# EAGLE board nummerpresentation (EAGLE 4.16)

Size 160 x 100 mm. Coordinates in mm from the lower left corner, seen from the top.
Outline: 0,0 160,0 160,100 0,100 0,0
Copper layers (1*16): Top 0.035mm / dielectric 1.5mm / Bottom 0.035mm
Design rules "default": minimum track width 10mil, minimum drill 24mil, track to track 8mil, track to pad 8mil, pad to pad 8mil, via to via 8mil, smd to smd 8mil, copper to edge 40mil, drill to drill 8mil, minimum pad ring 10mil, minimum via ring 8mil, stop-mask expansion 4mil, vias tented up to drill 0mil, thermal gap 10mil

## Footprints (pad centres in the part's own frame; a part is rotated, then mirrored left to right if it is on the bottom)
C0805K = smd 1.3 x 1.6: 1 -1,0; 2 1,0
CTRIMTZBX4 = smd 1.6 x 1.2: 1 0,1.8; 2 0,-1.8
PANASONIC_B = smd 2.2 x 1.4: + 1.6,0; - -1.6,0
PANASONIC_C = smd 2.6 x 1.4: + 2.05,0; - -2.05,0
PANASONIC_E = smd 3.8 x 1.4: + 3,0; - -3,0
E3,5-10 = drill 0.813 pad 1.6 round: + -1.778,0 | drill 0.813 pad 1.6 octagon: - 1.778,0
PANASONIC_D = smd 3 x 1.4: + 2.4,0; - -2.4,0
BAV216 = smd 1 x 1.25: P$1 0.73,0; P$2 3.13,0.01
SMA = smd 1.58 x 1.41: P$1 -2.63,0.48; P$2 2.53,0.51
SMB = smd 2.4 x 2.4: A 2.2,0; C -2.2,0
CR2032V = drill 1.321 pad 3.15 octagon: + -2.54,-5.08; +@1 -2.54,5.08; - 2.286,0
LSP10 = drill 1.016 pad 2.159 octagon: MP 0,0
DTMF_MT8880CE = drill 0.813 long: 1 -7.62,10.16; 2 -7.62,7.62; 3 -7.62,5.08; 4 -7.62,2.54; 5 -7.62,0; 6 -7.62,-2.54; 7 -7.62,-5.08; 8 -7.62,-7.62; 9 -7.62,-10.16; 10 -7.62,-12.7; 11 0,-12.7; 12 0,-10.16; 13 0,-7.62; 14 0,-5.08; 15 0,-2.54; 16 0,0; 17 0,2.54; 18 0,5.08; 19 0,7.62; 20 0,10.16
TQFP44 = smd 1.5 x 0.5: 1 -5.8,4; 2 -5.8,3.2; 3 -5.8,2.4; 4 -5.8,1.6; 5 -5.8,0.8; 6 -5.8,0; 7 -5.8,-0.8; 8 -5.8,-1.6; 9 -5.8,-2.4; 10 -5.8,-3.2; 11 -5.8,-4; 23 5.8,-4; 24 5.8,-3.2; 25 5.8,-2.4; 26 5.8,-1.6; 27 5.8,-0.8; 28 5.8,0; 29 5.8,0.8; 30 5.8,1.6; 31 5.8,2.4; 32 5.8,3.2; 33 5.8,4 | smd 0.5 x 1.5: 12 -4,-5.8; 13 -3.2,-5.8; 14 -2.4,-5.8; 15 -1.6,-5.8; 16 -0.8,-5.8; 17 0,-5.8; 18 0.8,-5.8; 19 1.6,-5.8; 20 2.4,-5.8; 21 3.2,-5.8; 22 4,-5.8; 34 4,5.8; 35 3.2,5.8; 36 2.4,5.8; 37 1.6,5.8; 38 0.8,5.8; 39 0,5.8; 40 -0.8,5.8; 41 -1.6,5.8; 42 -2.4,5.8; 43 -3.2,5.8; 44 -4,5.8
SO8 = smd 0.6 x 2.2: 1 -1.905,-2.6; 2 -0.635,-2.6; 3 0.635,-2.6; 4 1.905,-2.6; 5 1.905,2.6; 6 0.635,2.6; 7 -0.635,2.6; 8 -1.905,2.6
DIL16 = drill 0.813 long: 1 -7.62,-3.81; 2 -5.08,-3.81; 3 -2.54,-3.81; 4 0,-3.81; 5 2.54,-3.81; 6 5.08,-3.81; 7 7.62,-3.81; 8 10.16,-3.81; 9 10.16,3.81; 10 7.62,3.81; 11 5.08,3.81; 12 2.54,3.81; 13 0,3.81; 14 -2.54,3.81; 15 -5.08,3.81; 16 -7.62,3.81
DIL08 = drill 0.813 long: 1 -2.54,-3.81; 2 0,-3.81; 3 2.54,-3.81; 4 5.08,-3.81; 5 5.08,3.81; 6 2.54,3.81; 7 0,3.81; 8 -2.54,3.81
TQFP32-08 = smd 1.27 x 0.559: 1 -4.293,2.8; 2 -4.293,2; 3 -4.293,1.2; 4 -4.293,0.4; 5 -4.293,-0.4; 6 -4.293,-1.2; 7 -4.293,-2; 8 -4.293,-2.8; 17 4.293,-2.8; 18 4.293,-2; 19 4.293,-1.2; 20 4.293,-0.4; 21 4.293,0.4; 22 4.293,1.2; 23 4.293,2; 24 4.293,2.8 | smd 0.559 x 1.27: 9 -2.8,-4.293; 10 -2,-4.293; 11 -1.2,-4.293; 12 -0.4,-4.293; 13 0.4,-4.293; 14 1.2,-4.293; 15 2,-4.293; 16 2.8,-4.293; 25 2.8,4.293; 26 2,4.293; 27 1.2,4.293; 28 0.4,4.293; 29 -0.4,4.293; 30 -1.2,4.293; 31 -2,4.293; 32 -2.8,4.293
SO-08 = smd 0.6 x 2.2: 1 -1.905,-2.6; 2 -0.635,-2.6; 3 0.635,-2.6; 4 1.905,-2.6; 5 1.905,2.6; 6 0.635,2.6; 7 -0.635,2.6; 8 -1.905,2.6
78LXX = drill 0.813 octagon: GND 0,1.905; IN 1.27,0; OUT -1.27,0
215876-6 = drill 0.889 round: 1 -1.905,6.35; 2 -0.635,8.89; 3 0.635,6.35; 4 1.905,8.89 | hole 3.251: -5.08,0; 5.08,0
GN-A = smd 1 x 2.2: 1 -3.835,2.65; 3 1.975,-2.63; 4 4.475,-2.57; 5 7.105,-2.59; 8 7.025,2.59; 9 4.475,2.65; 10 1.975,2.63; 12 -3.835,-2.65
DISPLAY_CON_MOD_14X1 = drill 0.914 long: 1 -15.24,0; 2 -12.7,0; 3 -10.16,0; 4 -7.62,0; 5 -5.08,0; 6 -2.54,0; 7 0,0; 8 2.54,0; 9 5.08,0; 10 7.62,0; 11 10.16,0; 12 12.7,0; 13 15.24,0; 14 17.78,0; 15 20.32,0; 16 22.86,0
1206 = smd 1.6 x 1.803: A -1.422,0; C 1.422,0
USB_4POL_PCB_FEMALE = drill 0.95 round: 1 0.03,2.69; 2 2.04,2.71; 3 4.06,2.69; 4 6.07,2.71 | hole 2.3: -2.16,0; 8.26,-0.07
NEB25R = drill 0.813 pad 2.54 long: + 0,7.35; - 0,1.35; C 4.9,4.4
MA03-2 = drill 1.016 round: 1 -2.54,-1.27 | drill 1.016 octagon: 2 -2.54,1.27; 3 0,-1.27; 4 0,1.27; 5 2.54,-1.27; 6 2.54,1.27
SOT23-BEC = smd 1 x 1.4: B -0.95,-1.1; C 0,1.1; E 0.95,-1.1
R0805W = smd 1.5 x 1: 1 -0.94,0; 2 0.94,0
23B = smd 2 x 1.3: 1 1.01,-0.65; 2 6.4,-1.78; 3 6.4,0.5
M0805 = smd 1.3 x 1.6: 1 -0.95,0; 2 0.95,0
R0603 = smd 1 x 1.1: 1 -0.85,0; 2 0.85,0
SWC_SKHUALE010 = smd 2.75 x 1.4: 1 1.385,0.735; 2 8.138,0.737; 3 1.39,-1.888; 4 8.14,-1.857
CWC9000 = drill 0.7 round: 1 5.95,3.07; 3 -1.57,3.08; 4 5.96,-9.66; 6 -1.56,-9.65
FEDUSIAL_1MM = smd 1 x 1: P$1 0,0 | smd 1 x 1 bottom: P$2 0,0
SM49 = smd 5.08 x 1.778: 1 -4.826,0; 2 4.826,0
MURATA_RESONATOR = smd 0.8 x 2.6: 1 -1.5,0; 2 0,0; 3 1.5,0
CFPC_CRYSTAL = smd 1.6 x 1.3: P$1 0.87,0.7; P$2 3.47,0.7

## Placement (x,y rotation side)
C1  100n  [C0805K]  -130.18,91.91 0 top  (outside the outline)
C2  100n  [C0805K]  -140.34,91.91 0 top  (outside the outline)
C3  100n  [C0805K]  -150.5,91.91 0 top  (outside the outline)
C4  100n  [C0805K]  -160.66,91.91 0 top  (outside the outline)
C5  100n  [C0805K]  -17.15,99.53 0 top  (outside the outline)
C6  6p5F-30pF  [CTRIMTZBX4]  -17.15,74.13 0 top  (outside the outline)
C7  100n  [C0805K]  -27.31,99.53 0 top  (outside the outline)
C8  22pF  [C0805K]  -37.47,99.53 0 top  (outside the outline)
C9  22pF  [C0805K]  -47.63,99.53 0 top  (outside the outline)
C10  18pF  [C0805K]  -57.79,99.53 0 top  (outside the outline)
C11  18pF  [C0805K]  -67.95,99.53 0 top  (outside the outline)
C12  100n  [C0805K]  -78.11,99.53 0 top  (outside the outline)
C13  330nF/50V  [PANASONIC_B]  -43.82,84.29 0 top  (outside the outline)
C14  1nF  [C0805K]  -88.27,99.53 0 top  (outside the outline)
C15  4u7/50V  [PANASONIC_C]  -154.31,74.13 0 top  (outside the outline)
C16  10u/16V  [PANASONIC_B]  -55.25,84.29 0 top  (outside the outline)
C17  100n  [C0805K]  -98.43,99.53 0 top  (outside the outline)
C18  470u/16V  [PANASONIC_E]  -94.62,74.13 0 top  (outside the outline)
C19  100n  [C0805K]  -108.59,99.53 0 top  (outside the outline)
C20  33n  [C0805K]  -118.75,99.53 0 top  (outside the outline)
C21  100n  [C0805K]  -128.91,99.53 0 top  (outside the outline)
C22  100n  [C0805K]  -139.07,99.53 0 top  (outside the outline)
C23  470uF  [E3,5-10]  -149.23,61.43 0 top  (outside the outline)
C24  100n  [C0805K]  -149.23,99.53 0 top  (outside the outline)
C25  100n  [C0805K]  -159.39,99.53 0 top  (outside the outline)
C26  4u7  [E3,5-10]  -164.47,61.43 0 top  (outside the outline)
C27  220u/16V  [PANASONIC_D]  -19.69,84.29 0 top  (outside the outline)
C28  33n  [C0805K]  -17.15,107.15 0 top  (outside the outline)
C29  47n  [C0805K]  -27.31,107.15 0 top  (outside the outline)
C30  10u/30V  [PANASONIC_B]  -66.68,84.29 0 top  (outside the outline)
C31  10u/30V  [PANASONIC_B]  -78.11,84.29 0 top  (outside the outline)
D1  BAV216  [BAV216]  -153.04,107.15 0 top  (outside the outline)
D2  BAV216  [BAV216]  -161.93,107.15 0 top  (outside the outline)
D3  S1D  [SMA]  -153.04,83.02 0 top  (outside the outline)
D4  S1D  [SMA]  -18.42,91.91 0 top  (outside the outline)
D5  LL4001G  [SMB]  -32.39,84.29 0 top  (outside the outline)
G1  CR2032V  [CR2032V]  -57.79,10.63 0 top  (outside the outline)
HT1  LSP10  [LSP10]  -88.27,84.29 0 top  (outside the outline)
HT2  LSP10  [LSP10]  -97.16,84.29 0 top  (outside the outline)
IC1  MT8880CE  [DTMF_MT8880CE]  -18.42,19.52 0 top  (outside the outline)
IC2  MEGA16-A  [TQFP44]  -40.01,46.19 0 top  (outside the outline)
IC3  PCF8583T  [SO8]  -107.32,42.38 0 top  (outside the outline)
IC4  M24512  [SO8]  -118.75,42.38 0 top  (outside the outline)
IC5  74HCT5555P  [DIL16]  -121.29,10.63 0 top  (outside the outline)
IC6  LS1240A  [DIL08]  -146.69,10.63 0 top  (outside the outline)
IC7  FT232BL  [TQFP32-08]  -73.03,43.65 0 top  (outside the outline)
IC8  93LC66SN  [SO-08]  -130.18,42.38 0 top  (outside the outline)
IC9  L7805CP  [78LXX]  -132.72,72.86 0 top  (outside the outline)
IC10  LM386  [SO8]  -141.61,42.38 0 top  (outside the outline)
J1  [215876-6]  -74.3,9.36 0 top  (outside the outline)
J2  [215876-6]  -94.62,9.36 0 top  (outside the outline)
K1  G6S-2F  [GN-A]  -93.35,42.38 0 top  (outside the outline)
LCD1  [DISPLAY_CON_MOD_14X1]  -41.28,62.7 0 top  (outside the outline)
LED1  [1206]  -107.32,84.29 0 top  (outside the outline)
LED2  [1206]  -118.75,84.29 0 top  (outside the outline)
LED3  [1206]  -130.18,84.29 0 top  (outside the outline)
LED4  [1206]  -141.61,84.29 0 top  (outside the outline)
P1  [USB_4POL_PCB_FEMALE]  -24.77,46.19 0 top  (outside the outline)
P2  NEB25R  [NEB25R]  -57.79,42.38 0 top  (outside the outline)
P3  [MA03-2]  -80.65,74.13 0 top  (outside the outline)
Q1  BC817  [SOT23-BEC]  -107.32,74.13 0 top  (outside the outline)
Q2  BC817  [SOT23-BEC]  -117.48,74.13 0 top  (outside the outline)
R1  100k  [R0805W]  -38.74,107.15 0 top  (outside the outline)
R2  100k  [R0805W]  -50.17,107.15 0 top  (outside the outline)
R3  3k3  [R0805W]  -61.6,107.15 0 top  (outside the outline)
R4  330r  [R0805W]  -73.03,107.15 0 top  (outside the outline)
R5  2k7  [R0805W]  -84.46,107.15 0 top  (outside the outline)
R6  [23B]  -71.76,75.4 0 top  (outside the outline)
R7  1k  [M0805]  -31.12,91.91 0 top  (outside the outline)
R8  180R  [M0805]  -42.55,91.91 0 top  (outside the outline)
R9  49k9  [M0805]  -53.98,91.91 0 top  (outside the outline)
R10  24k9  [M0805]  -65.41,91.91 0 top  (outside the outline)
R11  2k2  [R0805W]  -95.89,107.15 0 top  (outside the outline)
R12  15k  [R0805W]  -107.32,107.15 0 top  (outside the outline)
R13  2k2  [R0805W]  -118.75,107.15 0 top  (outside the outline)
R14  510r  [R0805W]  -130.18,107.15 0 top  (outside the outline)
R15  1k  [M0805]  -76.84,91.91 0 top  (outside the outline)
R16  56r  [M0805]  -88.27,91.91 0 top  (outside the outline)
R17  220r  [R0603]  -18.42,114.77 0 top  (outside the outline)
R18  220r  [R0603]  -28.58,114.77 0 top  (outside the outline)
R19  470r  [R0603]  -38.74,114.77 0 top  (outside the outline)
R20  27r  [R0603]  -48.9,114.77 0 top  (outside the outline)
R21  27r  [R0603]  -59.06,114.77 0 top  (outside the outline)
R22  1k5  [R0603]  -69.22,114.77 0 top  (outside the outline)
R23  4k7  [R0603]  -79.38,114.77 0 top  (outside the outline)
R24  10k  [R0603]  -89.54,114.77 0 top  (outside the outline)
R25  2k2  [R0603]  -99.7,114.77 0 top  (outside the outline)
R26  180R  [M0805]  -99.7,91.91 0 top  (outside the outline)
R27  47R  [M0805]  -111.13,91.91 0 top  (outside the outline)
R28  10R  [R0805W]  -141.61,107.15 0 top  (outside the outline)
SWC1  UP  [SWC_SKHUALE010]  -75.57,62.7 0 top  (outside the outline)
SWC2  DOWN  [SWC_SKHUALE010]  -90.81,62.7 0 top  (outside the outline)
SWC3  LEFT  [SWC_SKHUALE010]  -106.05,62.7 0 top  (outside the outline)
SWC4  RIGHT  [SWC_SKHUALE010]  -121.29,62.7 0 top  (outside the outline)
SWC5  OK  [SWC_SKHUALE010]  -136.53,62.7 0 top  (outside the outline)
T1  CWC9000  [CWC9000]  -43.82,16.98 0 top  (outside the outline)
U$1  FEDUSIAL_1MM  [FEDUSIAL_1MM]  -164.47,25.87 0 top  (outside the outline)
U$3  FEDUSIAL_1MM  [FEDUSIAL_1MM]  -164.47,19.52 0 top  (outside the outline)
U$6  FEDUSIAL_1MM  [FEDUSIAL_1MM]  -164.47,13.17 0 top  (outside the outline)
U$7  FEDUSIAL_1MM  [FEDUSIAL_1MM]  -164.47,6.82 0 top  (outside the outline)
X1  12MHz  [SM49]  -31.12,74.13 0 top  (outside the outline)
X2  3.579545 MHz  [SM49]  -51.44,74.13 0 top  (outside the outline)
X4  [MURATA_RESONATOR]  -142.88,72.86 0 top  (outside the outline)
X5  32.768 kHz  [CFPC_CRYSTAL]  -122.56,91.91 0 top  (outside the outline)

## Library data of the parts
C1-C31 R1-R5 R7-R28 = rcl
D1 D2 IC3 IC7 P1 X4 = sc-librari
D3 D4 IC1 IC4-IC6 IC10 K1 LCD1 R6 SWC1-SWC5 T1 U$1 U$3 U$6 U$7 X5 = sc-library
D5 = diode
G1 = battery
HT1 HT2 = solpad
IC2 = atmel
IC8 = microchip
IC9 = v-reg
J1 J2 = con-amp
LED1-LED4 = led
P2 = con-lumberg
P3 = con-lstb
Q1 Q2 = transistor-npn
X1 X2 = crystal

## Nets
0V: C19.2 C22.2 C23.- C24.1 C25.1 C26.- IC7.9 IC7.17 IC8.5 IC9.GND P2.+ R26.2
+3V3: C23.+ C24.2 D5.C IC9.IN
CLK: IC1.12 IC2.44
CS: IC1.10 IC2.15
D0: IC1.14 IC2.40
D1: IC1.15 IC2.41
D2: IC1.16 IC2.42
D3: IC1.17 IC2.43
E: IC2.24 LCD1.6
GND: C1.2 C2.2 C3.2 C4.2 C5.2 C8.2 C9.2 C10.2 C11.2 C16.- C17.2 C20.1 C21.1 C28.1 C30.- C31.- D4.P$1 G1.- HT2.MP IC1.5 IC2.6 IC2.18 IC2.28 IC2.39 IC3.3 IC3.4 IC4.1 IC4.2 IC4.3 IC4.4 IC4.7 IC5.5 IC5.6 IC5.7 IC5.8 IC5.10 IC5.11 IC5.12 IC5.15 IC6.2 IC7.18 IC7.19 IC7.20 IC7.22 IC7.29 IC7.31 IC10.1 IC10.3 IC10.4 LCD1.1 LCD1.5 P1.4 P3.6 Q1.E Q2.E R6.3 R8.2 R12.2 R13.2 R28.2 T1.6 X4.2
IRQ/CP: IC1.13 IC2.22 R3.1
LCD0: IC2.37 LCD1.7 SWC5.1
LCD1: IC2.36 LCD1.8 SWC4.1
LCD2: IC2.35 LCD1.9 SWC3.1
LCD3: IC2.34 LCD1.10 SWC2.1
LCD4: IC2.33 LCD1.11 SWC1.1
LCD5: IC2.32 LCD1.12
LCD6: IC2.31 LCD1.13
LCD7: IC2.30 LCD1.14
LIGHT: IC2.26 R15.1
MISO: IC2.2 P3.1
MOSI: IC2.1 P3.4
N$1: C7.2 IC1.19 R4.1
N$2: IC1.1 IC1.4
N$3: IC1.18 R4.2
N$4: C9.1 IC2.8 X1.2
N$5: C10.1 IC1.7 X2.2
N$6: C11.1 IC1.6 X2.1
N$7: IC1.2 R1.2 R2.1
N$8: IC1.3 R1.1
N$9: C12.2 R2.2
N$10: C12.1 T1.4
N$11: C6.1 IC3.1 X5.P$2
N$12: D2.P$2 G1.+
N$13: IC3.2 X5.P$1
N$14: LCD1.3 R6.1
N$15: C6.2 D1.P$1 D2.P$1 IC3.8
N$16: C13.- R5.2
N$17: C13.+ C15.+ J1.1 J1.2 K1.3
N$18: R5.1 T1.1
N$19: J2.1 J2.2 K1.4
N$20: IC6.1 J1.3 J1.4 K1.10 T1.3
N$21: Q1.B R7.2
N$22: D3.P$2 K1.1 Q1.C
N$23: IC5.9 R7.1
N$24: J2.3 J2.4 K1.9
N$25: C14.1 IC5.3
N$26: C14.2 R9.2 R10.2
N$27: IC5.2 R10.1
N$28: IC5.1 R9.1
N$29: LCD1.16 R16.2
N$30: C15.- R11.2
N$31: IC6.8 R11.1
N$32: C17.1 IC6.3
N$33: C16.+ IC6.7
N$34: IC6.4 R12.1
N$35: Q2.B R15.2
N$36: C18.+ D4.P$2 R14.1
N$37: D5.A P2.-
N$38: Q2.C R16.1
N$39: LED1.C R26.1
N$40: IC7.12 R17.1
N$41: IC7.11 R18.1
N$42: LED4.C R17.2
N$43: LED3.C R18.2
N$45: C20.2 IC7.6
N$46: C21.2 IC7.30 R19.1
N$47: C8.1 IC2.7 X1.1
N$48: IC7.8 R20.2
N$49: P1.2 R20.1
N$50: IC7.7 R21.2 R22.1
N$51: IC7.5 R22.2
N$52: IC7.4 R23.2
N$53: IC8.4 R24.1 R25.2
N$54: IC7.28 X4.1
N$55: LED2.C R8.1
N$56: IC7.27 X4.3
N$57: IC7.1 IC8.2
N$58: IC7.32 IC8.1
N$59: C27.+ C29.2 IC10.6
N$60: P1.3 R21.1
N$61: C29.1 R28.1
N$62: C30.+ IC10.7
N$63: IC7.2 IC8.3 R25.1
N$64: C27.- HT1.MP
N$65: C28.2 IC10.2 R27.1
N$67: C31.+ IC10.8
R/W: IC1.9 IC2.13
RESET: IC2.4 P3.5
RS: IC2.23 LCD1.4
RS0: IC1.11 IC2.14
RSIG: C18.- IC2.12 IC6.5 R13.1 R14.2
RXD: IC2.9 IC7.24
SCK: IC2.3 P3.3
SCL: IC2.19 IC3.6 IC4.6
SDA0: IC2.20 IC4.5
SDA1: IC2.21 IC3.5
SOUND: IC2.25 R27.2
SPE: IC2.11 IC5.4
SWC: IC2.16 SWC1.3 SWC1.4 SWC2.3 SWC2.4 SWC3.3 SWC3.4 SWC4.3 SWC4.4 SWC5.3 SWC5.4
TXD: IC2.10 IC7.25
VCC: C1.1 C2.1 C3.1 C4.1 C5.1 C7.1 C19.1 C22.1 C25.2 C26.+ D1.P$2 D3.P$1 IC1.20 IC2.5 IC2.17 IC2.27 IC2.29 IC2.38 IC4.8 IC5.13 IC5.14 IC5.16 IC7.3 IC7.13 IC7.14 IC7.26 IC8.6 IC8.8 IC9.OUT K1.12 LCD1.2 LCD1.15 LED1.A LED2.A LED3.A LED4.A P1.1 P3.2 R3.2 R6.2 R19.2 R23.1 R24.2

## Tracks (layer width: path | path; a pad name or v marks a point on that pad's centre or on a via)
0V  (11 unrouted)
+3V3  (3 unrouted)
CLK  (1 unrouted)
CS  (1 unrouted)
D0  (1 unrouted)
D1  (1 unrouted)
D2  (1 unrouted)
D3  (1 unrouted)
E  (1 unrouted)
GND  (61 unrouted)
IRQ/CP  (2 unrouted)
LCD0  (2 unrouted)
LCD1  (2 unrouted)
LCD2  (2 unrouted)
LCD3  (2 unrouted)
LCD4  (2 unrouted)
LCD5  (1 unrouted)
LCD6  (1 unrouted)
LCD7  (1 unrouted)
LIGHT  (1 unrouted)
MISO  (1 unrouted)
MOSI  (1 unrouted)
N$1  (2 unrouted)
N$2  (1 unrouted)
N$3  (1 unrouted)
N$4  (2 unrouted)
N$5  (2 unrouted)
N$6  (2 unrouted)
N$7  (2 unrouted)
N$8  (1 unrouted)
N$9  (1 unrouted)
N$10  (1 unrouted)
N$11  (2 unrouted)
N$12  (1 unrouted)
N$13  (1 unrouted)
N$14  (1 unrouted)
N$15  (3 unrouted)
N$16  (1 unrouted)
N$17  (4 unrouted)
N$18  (1 unrouted)
N$19  (2 unrouted)
N$20  (4 unrouted)
N$21  (1 unrouted)
N$22  (2 unrouted)
N$23  (1 unrouted)
N$24  (2 unrouted)
N$25  (1 unrouted)
N$26  (2 unrouted)
N$27  (1 unrouted)
N$28  (1 unrouted)
N$29  (1 unrouted)
N$30  (1 unrouted)
N$31  (1 unrouted)
N$32  (1 unrouted)
N$33  (1 unrouted)
N$34  (1 unrouted)
N$35  (1 unrouted)
N$36  (2 unrouted)
N$37  (1 unrouted)
N$38  (1 unrouted)
N$39  (1 unrouted)
N$40  (1 unrouted)
N$41  (1 unrouted)
N$42  (1 unrouted)
N$43  (1 unrouted)
N$45  (1 unrouted)
N$46  (2 unrouted)
N$47  (2 unrouted)
N$48  (1 unrouted)
N$49  (1 unrouted)
N$50  (2 unrouted)
N$51  (1 unrouted)
N$52  (1 unrouted)
N$53  (2 unrouted)
N$54  (1 unrouted)
N$55  (1 unrouted)
N$56  (1 unrouted)
N$57  (1 unrouted)
N$58  (1 unrouted)
N$59  (2 unrouted)
N$60  (1 unrouted)
N$61  (1 unrouted)
N$62  (1 unrouted)
N$63  (2 unrouted)
N$64  (1 unrouted)
N$65  (2 unrouted)
N$67  (1 unrouted)
R/W  (1 unrouted)
RESET  (1 unrouted)
RS  (1 unrouted)
RS0  (1 unrouted)
RSIG  (4 unrouted)
RXD  (1 unrouted)
SCK  (1 unrouted)
SCL  (2 unrouted)
SDA0  (1 unrouted)
SDA1  (1 unrouted)
SOUND  (1 unrouted)
SPE  (1 unrouted)
SWC  (10 unrouted)
TXD  (1 unrouted)
VCC  (42 unrouted)